# Altium PCB SistemaMinimo-dsPIC33FJ64MC804.PcbDoc
Units mm, origin at the board's own origin, x right, y up, seen from the top; angles counter-clockwise.
Board outline 22.35 x 56.75 mm, 2 copper layers (Top Layer, Bottom Layer); 3 components, 39 nets, 88 pads, 0 vias.
Unrouted connection lines stored in the file: 5.
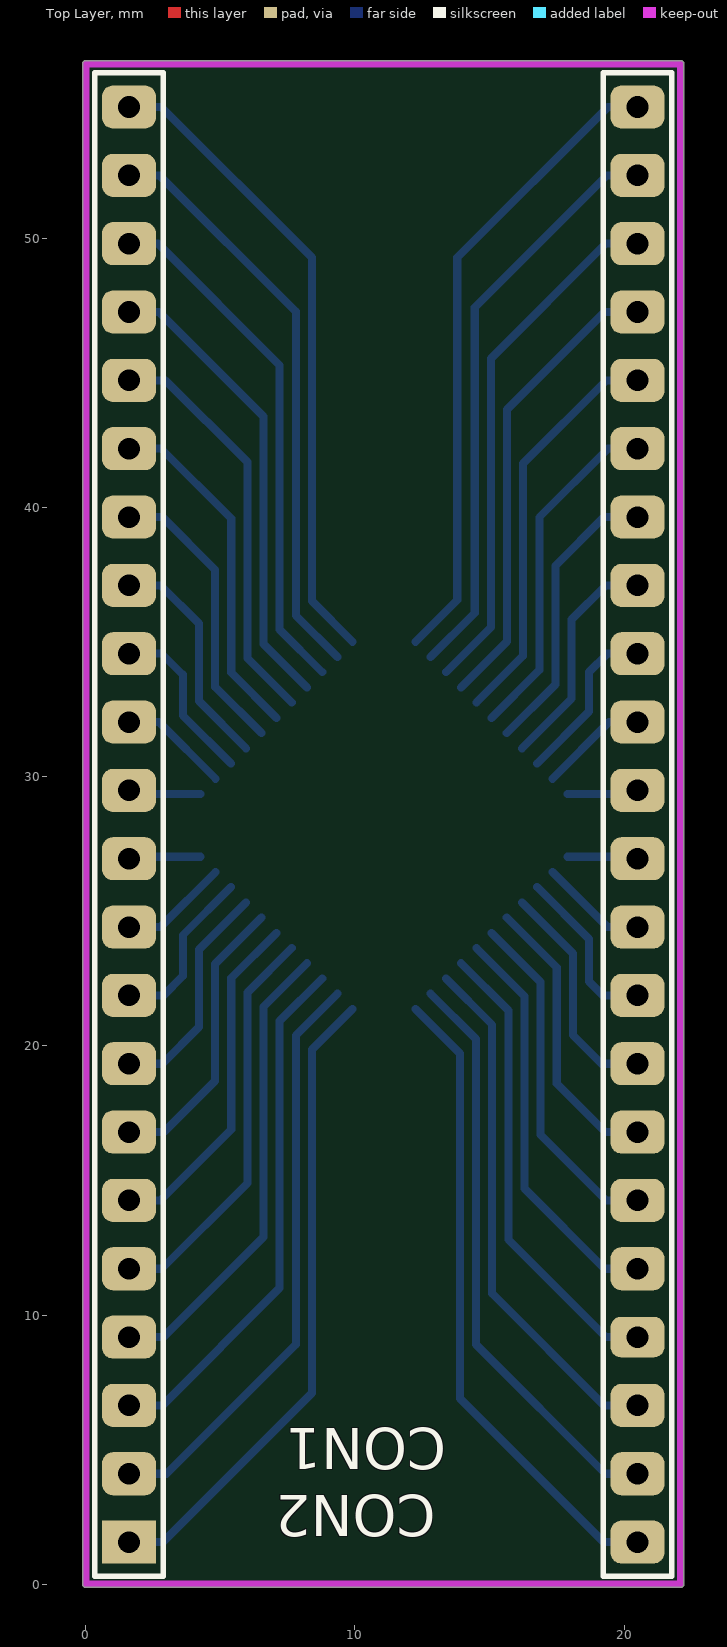
[diagram p0: Top Layer view]
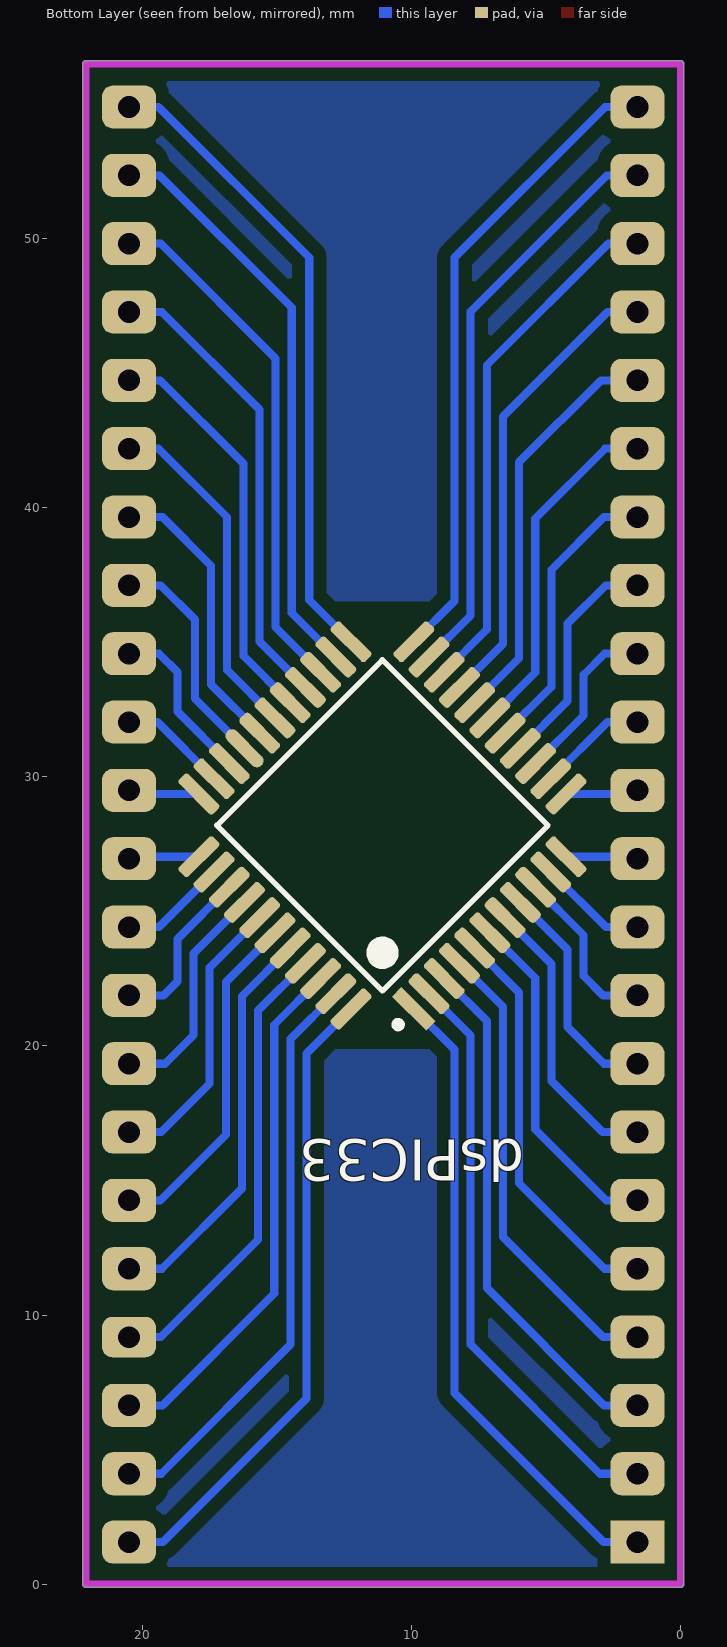
[diagram p1: Bottom Layer view, seen from below]

## Layer stack, top to bottom
Top Layer: signal copper 0.0356
Dielectric: dielectric 0.32, FR-4, Dk 4.8
Bottom Layer: signal copper 0.0356

## Board outline
-0.125,0 ccw(c0,0) 0,-0.125 22.1,-0.125 ccw(c22.1,0) 22.225,0 22.225,56.5 ccw(c22.1,56.5) 22.1,56.625 0,56.625 ccw(c0,56.5) -0.125,56.5

## Design rules (kind name [scope] priority, off if disabled: settings)
AssemblyTestPointUsage AssemblyTestPointUsage_1 [All] p2:
AssemblyTestpoint AssemblyTestpoint_1 [All] p2: testpointundercomponent=TRUE minsize=1.016 maxsize=2.54 preferedsize=1.524 minholesize=0 maxholesize=1.016 preferedholesize=0.813 testpointgrid=0.025 usegrid=TRUE gridtolerance=0 allowsidetop=TRUE allowsidebottom=TRUE
Clearance [All] p1: gap=0.3
ComponentClearance ComponentClearance_1 [All] p2: gap=0.254 collisioncheckmode=3 verticalgap=0.254 showdistances=FALSE
DiffPairsRouting DiffPairsRouting_1 [All] p2: maxlimit=0.254 minlimit=0.254 mostfreqgap=0.254 maxuncoupledlength=12.7
FabricationTestPointUsage TestPointUsage [All] p2: valid=0 allowmultiple=FALSE
FabricationTestpoint Testpoint [All] p2: side=3 testpointundercomponent=TRUE minsize=1.016 maxsize=2.54 preferedsize=1.524 minholesize=0 maxholesize=1.016 preferedholesize=0.813 testpointgrid=0.025 allowsidetop=TRUE allowsidebottom=TRUE usegrid=TRUE gridtolerance=0
FanoutControl Fanout_LCC [IsLCC] p1: bgadir=Out bgaviamode=Centered fanoutstyle=Auto fanoutdirection=Alternating viagrid=0.025 // Fanout_LCC (Default Rule)
FanoutControl Fanout_BGA [IsBGA] p2: bgadir=Out bgaviamode=Centered fanoutstyle=Auto fanoutdirection=Alternating viagrid=0.025 // Fanout_BGA (Default Rule)
FanoutControl Fanout_Default [All] p4: bgadir=Out bgaviamode=Centered fanoutstyle=Auto fanoutdirection=Alternating viagrid=0.025 // Fanout_Default (Default Rule)
FanoutControl Fanout_Small [(CompPinCount < 5)] p5: bgadir=Out bgaviamode=Centered fanoutstyle=Auto fanoutdirection=OutThenIn viagrid=0.025 // Fanout_Small (Default Rule)
FanoutControl Fanout_BGA_1 [IsBGA] p6: bgadir=Out bgaviamode=Centered fanoutstyle=Auto fanoutdirection=Alternating viagrid=0.025 // Fanout_BGA (Default Rule)
FanoutControl Fanout_LCC_1 [IsLCC] p7: bgadir=Out bgaviamode=Centered fanoutstyle=Auto fanoutdirection=Alternating viagrid=0.025 // Fanout_LCC (Default Rule)
FanoutControl Fanout_SOIC_1 [IsSOIC] p8: bgadir=Out bgaviamode=Centered fanoutstyle=Auto fanoutdirection=Alternating viagrid=0.025 // Fanout_SOIC (Default Rule)
FanoutControl Fanout_Small_1 [(CompPinCount < 5)] p9: bgadir=Out bgaviamode=Centered fanoutstyle=Auto fanoutdirection=OutThenIn viagrid=0.025 // Fanout_Small (Default Rule)
FanoutControl Fanout_Default_1 [All] p10: bgadir=Out bgaviamode=Centered fanoutstyle=Auto fanoutdirection=Alternating viagrid=0.025 // Fanout_Default (Default Rule)
Height Height_1 [All] p2: minheight=0 maxheight=25.4 prefheight=12.7
HoleSize HoleSize_1 [All] p2: absolutevalues=TRUE maxlimit=2.54 minlimit=0.025 maxpercent=80.000 minpercent=20.000
HoleToHoleClearance HoleToHoleClearance_1 [All] p2: gap=0.254 allowstackedmicrovias=TRUE
LayerPairs LayerPairs_1 [All] p2: enforce=TRUE
MinimumSolderMaskSliver MinimumSolderMaskSliver_1 [All] p2: minsoldermaskwidth=0.254
NetAntennae NetAntennae_1 [All] p2: netantennaetolerance=0
PasteMaskExpansion PasteMaskExpansion_1 [All] p2: expansion=0
PlaneClearance PlaneClearance_1 [All] p2: clearance=0.508
PolygonConnect [All] p1: connectstyle=Relief reliefconductorwidth=0.254 reliefentries=4 polygonreliefangle="90 Angle" airgapwidth=0.254
PolygonConnect PolygonConnect_1 [All] p2: connectstyle=Relief reliefconductorwidth=0.254 reliefentries=4 polygonreliefangle="90 Angle" airgapwidth=0.254
RoutingPriority RoutingPriority_1 [All] p2: routingpriority=0
RoutingTopology RoutingTopology_1 [All] p2: topology=Shortest
RoutingVias [All] p1: holewidth=0.6 width=1 viastyle="Through Hole" minholewidth=0.711 minwidth=1.27 maxholewidth=0.711 maxwidth=1.27
ShortCircuit ShortCircuit_1 [All] p2: allowed=FALSE
SilkToSilkClearance SilkToSilkClearance_1 [All] p2: silktosilkclearance=0.254
SilkToSolderMaskClearance SilkscreenOverComponentPads [IsPad] p2: minsilkscreentomaskgap=0.254 clearancetoexposedcopper=TRUE
SolderMaskExpansion [All] p1: expansion=0.102
SolderMaskExpansion SolderMaskExpansion_1 [All] p2: expansion=0.102
UnRoutedNet UnRoutedNet_1 [All] p2:
Width [All] p1: maxlimit=5 minlimit=0.25 preferedwidth=0.3 minimp=50.000000 maximp=50.000000 favimp=50.000000
24 further rules are at their usual default settings.

## Components (designator, comment, footprint, x,y, rotation, side; value= is the part's Value field where it differs from the comment)
CON1 "Header 22" HDR1X22#1 1.6,1.56 r90 top
CON2 "Header 22" HDR1X22#2 20.5,54.9 r270 top
dsPIC33 "DSPIC33FJ64MC804-I/PT" TQFP-PT44_N 11.08,28.2 r45 bottom

## Footprints (in the part's own frame and the unit in brackets; to place one, negate y for a bottom-side part, rotate by r counter-clockwise, add the part's x,y. Pads: shape width x height; smd on the part's side, far side on the other; paste and mask are expansions set on the pad)
HDR1X22#1 [mm] "Connector; Header; 22 Position"
  rect 1.6x2 hole 0.8: 1(0,0)
  rrect50% 1.6x2 hole 0.8: 2(2.54,0) 3(5.08,0) 4(7.62,0) 5(10.16,0) 6(12.7,0) 7(15.24,0) 8(17.78,0) 9(20.32,0) 10(22.86,0) 11(25.4,0) 12(27.94,0) 13(30.48,0) 14(33.02,0) 15(35.56,0) 16(38.1,0) 17(40.64,0) 18(43.18,0) 19(45.72,0) 20(48.26,0) 21(50.8,0) 22(53.34,0)
  silkscreen extent -1.27,-1.27 54.61,1.27
HDR1X22#2 [mm] "Connector; Header; 22 Position"
  rrect50% 1.6x2 hole 0.8: 1(0,0) 2(2.54,0) 3(5.08,0) 4(7.62,0) 5(10.16,0) 6(12.7,0) 7(15.24,0) 8(17.78,0) 9(20.32,0) 10(22.86,0) 11(25.4,0) 12(27.94,0) 13(30.48,0) 14(33.02,0) 15(35.56,0) 16(38.1,0) 17(40.64,0) 18(43.18,0) 20(48.26,0) 21(50.8,0) 22(53.34,0)
  rrect50% 1.5x2 hole 0.8: 19(45.72,0)
  silkscreen extent -1.27,-1.27 54.61,1.27
TQFP-PT44_N [mm] "Thin QFP, 44-Leads, Body 10x10mm, Pitch 0.8mm, IPC Medium Density"
  rect 1.8x0.5 smd: 1(-5.65,4)
  rrect50% 1.8x0.5 smd: 2(-5.65,3.2) 3(-5.65,2.4) 4(-5.65,1.6) 5(-5.65,0.8) 6(-5.65,0) 7(-5.65,-0.8) 8(-5.65,-1.6) 9(-5.65,-2.4) 10(-5.65,-3.2) 11(-5.65,-4) 23(5.65,-4) 24(5.65,-3.2) 25(5.65,-2.4) 26(5.65,-1.6) 27(5.65,-0.8) 28(5.65,0) 29(5.65,0.8) 31(5.65,2.4) 32(5.65,3.2) 33(5.65,4)
  rrect50% 0.5x1.8 smd: 12(-4,-5.65) 13(-3.2,-5.65) 14(-2.4,-5.65) 15(-1.6,-5.65) 16(-0.8,-5.65) 17(0,-5.65) 18(0.8,-5.65) 19(1.6,-5.65) 20(2.4,-5.65) 21(3.2,-5.65) 22(4,-5.65) 34(4,5.65) 35(3.2,5.65) 36(2.4,5.65) 37(1.6,5.65) 38(0.8,5.65) 39(0,5.65) 40(-0.8,5.65) 41(-1.6,5.65) 42(-2.4,5.65) 43(-3.2,5.65) 44(-4,5.65)
  oval 1.8x0.5 smd: 30(5.65,1.6)
  silkscreen extent -5.77,-4.35 4.35,4.95, body extent -5,-5 5,5, height 1.2

## Part data
CON1 CON2: "Header, 22-Pin"
dsPIC33: "High-Performance 16-bit Digital Signal Controller, 64 KB Flash, 16 KB RAM, 44-Pin TQFP, Industrial Temperature"

## Nets (pads, with @x,y where several pads share a name; then routed paths per layer and width w, separated by ;. In a path a pad name is that pad's centre, name@x,y a point inside that pad or via, vN(x,y) a via of type N, cw(c..) or ccw(c..) an arc to the next point about the centre after c; other vN are vias at no path point)
NetCON1_1: CON1.1 dsPIC33.1 | length 24
  Bottom Layer w0.3: CON1.1 2.86,1.56 8.4,7.1 8.4,19.863 dsPIC33.1
NetCON1_2: CON1.2 dsPIC33.2 | length 21.9
  Bottom Layer w0.3: CON1.2 3,4.1 7.8,8.9 7.8,20.395 dsPIC33.2
NetCON1_3: CON1.3 dsPIC33.3 | length 19.6
  Bottom Layer w0.3: CON1.3 2.84,6.64 7.2,11 7.2,20.926 dsPIC33.3
NetCON1_4: CON1.4 dsPIC33.4 | length 17.4
  Bottom Layer w0.3: CON1.4 2.88,9.18 6.6,12.9 6.6,21.457 dsPIC33.4
NetCON1_5: CON1.5 dsPIC33.5 | length 15.1
  Bottom Layer w0.3: CON1.5 2.82,11.72 6,14.9 6,21.989 dsPIC33.5
NetCON1_6: CON1.6 CON1.16 CON2.7 CON2.17 dsPIC33.6 dsPIC33.16 dsPIC33.29 dsPIC33.39 | length 47.3
  Bottom Layer w0.3: CON1.6 2.76,14.26 5.4,16.9 5.4,22.52 dsPIC33.6 ; CON1.16 2.84,39.66 4.8,37.7 4.8,33.349 dsPIC33.16 ; dsPIC33.39 16.9,22.38 16.9,16.7 19.34,14.26 CON2.17 ; dsPIC33.29 17.45,33.439 17.45,37.85 19.26,39.66 CON2.7
NetCON1_7: CON1.7 dsPIC33.7 | length 10.8
  Bottom Layer w0.3: CON1.7 2.9,16.8 4.8,18.7 4.8,23.051 dsPIC33.7
NetCON1_8: CON1.8 dsPIC33.8 | length 8.5
  Bottom Layer w0.3: CON1.8 2.84,19.34 4.2,20.7 4.2,23.583 dsPIC33.8
NetCON1_9: CON1.9 dsPIC33.9 | length 6.3
  Bottom Layer w0.3: CON1.9 2.88,21.88 3.6,22.6 3.6,24.114 dsPIC33.9
NetCON1_10: CON1.10 dsPIC33.10 | length 4.1
  Bottom Layer w0.3: CON1.10 2.775,24.42 dsPIC33.10
NetCON1_11: CON1.11 dsPIC33.11 | length 2.7
  Bottom Layer w0.3: CON1.11 1.673,27.033 dsPIC33.11
NetCON1_12: CON1.12 dsPIC33.12 | length 2.7
  Bottom Layer w0.3: CON1.12 1.733,29.367 dsPIC33.12
NetCON1_13: CON1.13 dsPIC33.13 | length 4.1
  Bottom Layer w0.3: CON1.13 2.715,32.04 dsPIC33.13
NetCON1_14: CON1.14 dsPIC33.14 | length 6.4
  Bottom Layer w0.3: CON1.14 2.82,34.58 3.6,33.8 3.6,32.286 dsPIC33.14
NetCON1_15: CON1.15 dsPIC33.15 | length 8.6
  Bottom Layer w0.3: CON1.15 2.78,37.12 4.2,35.7 4.2,32.817 dsPIC33.15
NetCON1_17: CON1.17 CON2.6 CON2.18 dsPIC33.17 dsPIC33.28 dsPIC33.40 | length 41
  Bottom Layer w0.3: CON1.17 2.8,42.2 5.4,39.6 5.4,33.88 dsPIC33.17 ; dsPIC33.40 16.3,21.849 16.3,14.7 19.28,11.72 CON2.18 ; dsPIC33.28 16.85,33.97 16.85,39.65 19.4,42.2 CON2.6
NetCON1_18: CON1.18 dsPIC33.18 | length 15.3
  Bottom Layer w0.3: CON1.18 2.96,44.74 6,41.7 6,34.411 dsPIC33.18
NetCON1_19: CON1.19 dsPIC33.19 | length 17.4
  Bottom Layer w0.3: CON1.19 2.72,47.28 6.6,43.4 6.6,34.943 dsPIC33.19
NetCON1_20: CON1.20 dsPIC33.20 | length 19.5
  Bottom Layer w0.3: CON1.20 2.68,49.82 7.2,45.3 7.2,35.474 dsPIC33.20
NetCON1_21: CON1.21 dsPIC33.21 | length 21.8
  Bottom Layer w0.3: CON1.21 2.74,52.36 7.8,47.3 7.8,36.005 dsPIC33.21
NetCON1_22: CON1.22 dsPIC33.22 | length 24
  Bottom Layer w0.3: CON1.22 2.8,54.9 8.4,49.3 8.4,36.537 dsPIC33.22
NetCON2_1: CON2.1 dsPIC33.23 | length 23.9
  Bottom Layer w0.3: dsPIC33.23 13.8,36.577 13.8,49.3 19.4,54.9 CON2.1
NetCON2_2: CON2.2 dsPIC33.24 | length 21.8
  Bottom Layer w0.3: dsPIC33.24 14.45,36.095 14.45,47.45 19.36,52.36 CON2.2
NetCON2_3: CON2.3 dsPIC33.25 | length 19.6
  Bottom Layer w0.3: dsPIC33.25 15.05,35.564 15.05,45.55 19.32,49.82 CON2.3
NetCON2_4: CON2.4 dsPIC33.26 | length 17.4
  Bottom Layer w0.3: dsPIC33.26 15.65,35.033 15.65,43.65 19.28,47.28 CON2.4
NetCON2_5: CON2.5 dsPIC33.27 | length 15.1
  Bottom Layer w0.3: dsPIC33.27 16.25,34.501 16.25,41.65 19.34,44.74 CON2.5
NetCON2_8: CON2.8 dsPIC33.30 | length 8.5
  Bottom Layer w0.3: dsPIC33.30 18.05,32.907 18.05,35.85 19.32,37.12 CON2.8
NetCON2_9: CON2.9 dsPIC33.31 | length 6.3
  Bottom Layer w0.3: dsPIC33.31 18.7,32.426 18.7,33.9 19.38,34.58 CON2.9
NetCON2_10: CON2.10 dsPIC33.32 | length 4
  Bottom Layer w0.3: dsPIC33.32 19.445,32.04 CON2.10
NetCON2_11: CON2.11 dsPIC33.33 | length 2.7
  Bottom Layer w0.3: dsPIC33.33 CON2.11@20.367,29.367
  Bottom Layer w0.4: CON2.11@20.367,29.367 CON2.11
NetCON2_12: CON2.12 dsPIC33.34 | length 2.6
  Bottom Layer w0.3: dsPIC33.34 CON2.12@20.427,27.033
  Bottom Layer w0.4: CON2.12@20.427,27.033 CON2.12
NetCON2_13: CON2.13 dsPIC33.35 | length 4
  Bottom Layer w0.3: dsPIC33.35 19.385,24.42 CON2.13
NetCON2_14: CON2.14 dsPIC33.36 | length 6.3
  Bottom Layer w0.3: dsPIC33.36 18.7,23.974 18.7,22.4 19.22,21.88 CON2.14
NetCON2_15: CON2.15 dsPIC33.37 | length 8.6
  Bottom Layer w0.3: dsPIC33.37 18.1,23.443 18.1,20.4 19.16,19.34 CON2.15
NetCON2_16: CON2.16 dsPIC33.38 | length 10.7
  Bottom Layer w0.3: dsPIC33.38 17.5,22.911 17.5,18.6 19.3,16.8 CON2.16
NetCON2_19: CON2.19 dsPIC33.41 | length 17.3
  Bottom Layer w0.3: dsPIC33.41 15.7,21.317 15.7,12.8 19.32,9.18 CON2.19
NetCON2_20: CON2.20 dsPIC33.42 | length 19.5
  Bottom Layer w0.3: dsPIC33.42 15.1,20.786 15.1,10.8 19.26,6.64 CON2.20
NetCON2_21: CON2.21 dsPIC33.43 | length 21.7
  Bottom Layer w0.3: dsPIC33.43 14.5,20.255 14.5,8.9 19.3,4.1 CON2.21
NetCON2_22: CON2.22 dsPIC33.44 | length 24
  Bottom Layer w0.3: dsPIC33.44 13.9,19.723 13.9,6.9 19.24,1.56 CON2.22

## Polygon pours and split planes (outlines as drawn)
no net on Bottom Layer "Bottom Layer-No Net" (solid, pour order 4): 0,36.529 22,36.529 22.1,36.506 22.1,56.5 0,56.5
no net on Bottom Layer "Bottom Layer-No Net" (solid, pour order 4): 0,0 0,19.871 22.1,19.871 22.1,0

## Keep-outs
Keep-Out Layer:
  lines w0.25: 0,0 22.1,0 22.1,56.5 0,56.5 0,0